# Altium PCB SPT3G_LCBoardRev3.PcbDoc (part 3 of 4)
Units mil, origin at the board's own origin, x right, y up, seen from the top; angles counter-clockwise.
Board outline 7216.28 x 1969 mil, 6 copper layers (Top Layer, Signal Layer 1, Internal Plane 1, Internal Plane 2, Signal Layer 2, Bottom Layer), stack 61.6 mil thick; 25 components, 141 nets, 660 pads, 144 vias.
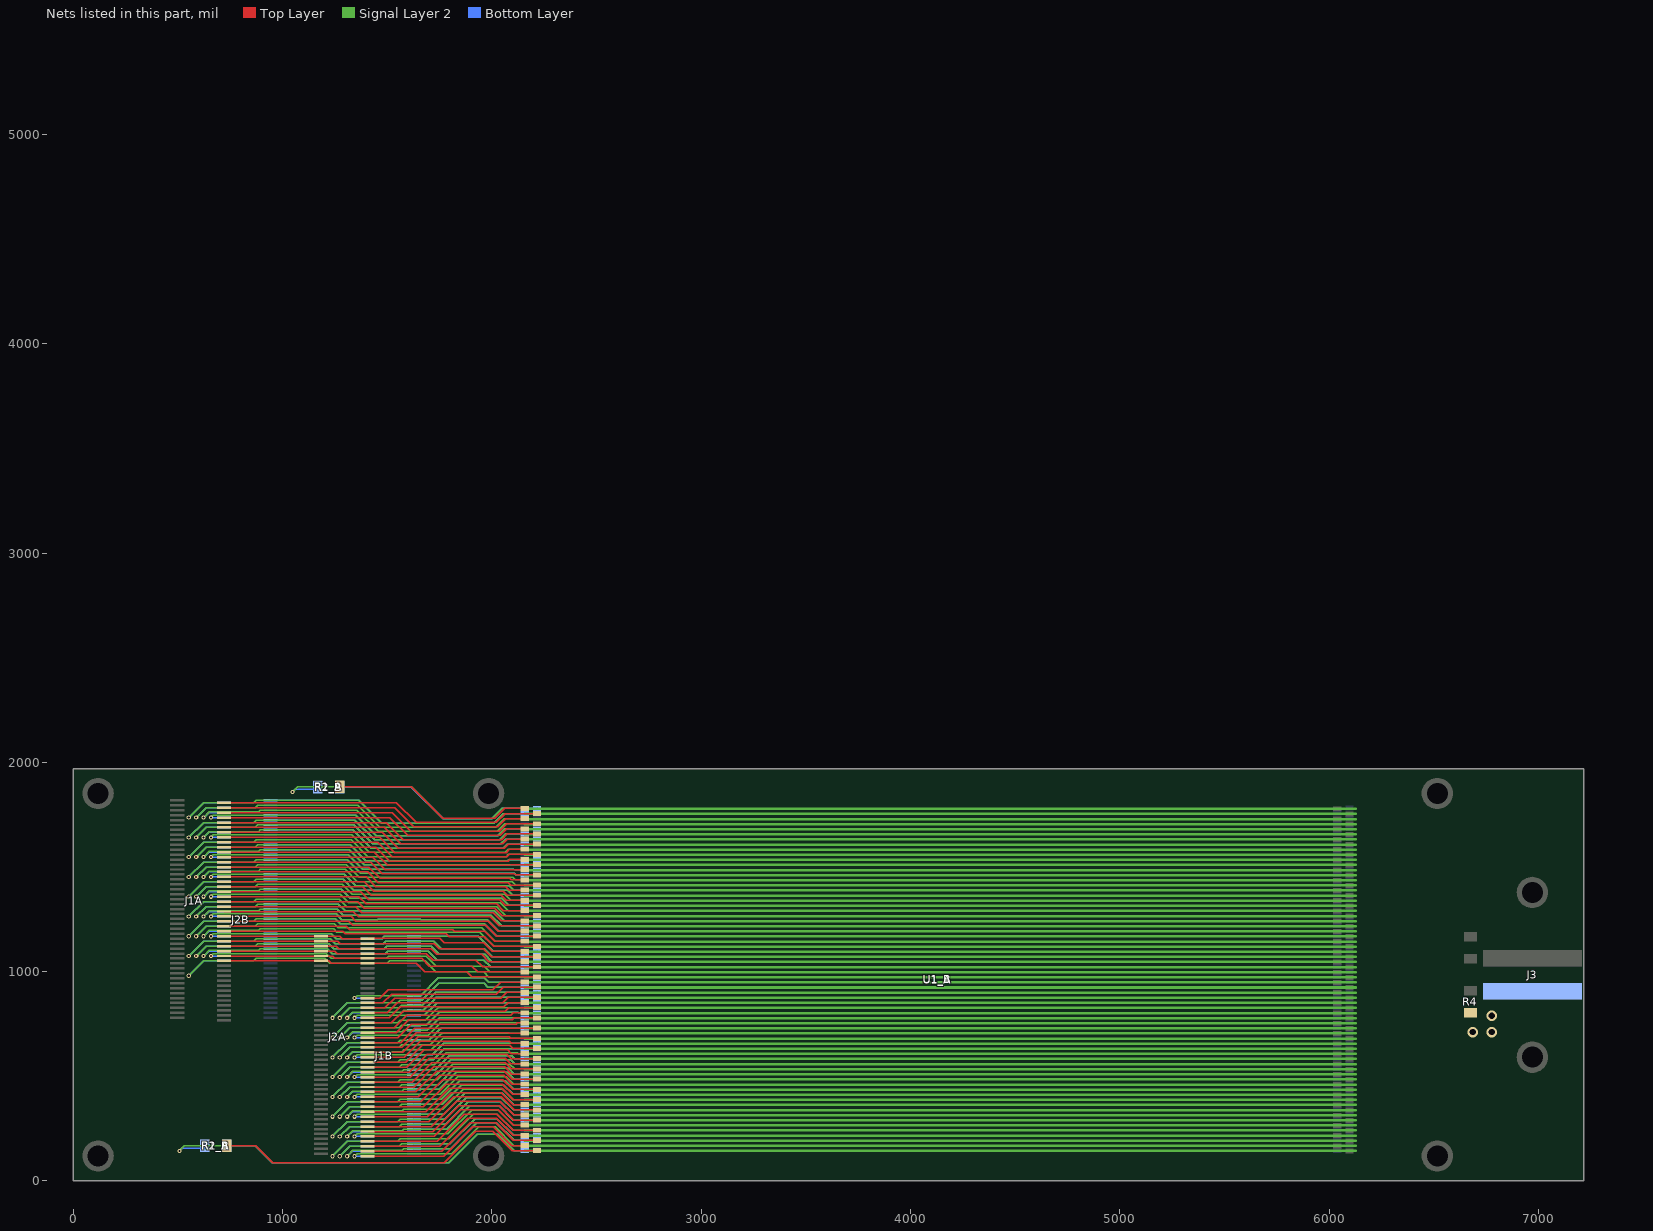
[diagram p7: the nets of this part, all layers, seen from the top]

## Via types
v1: diameter 20, hole 10, Top Layer to Bottom Layer, 136 vias
v2: diameter 50, hole 30, Top Layer to Bottom Layer, 8 vias

## Nets (pads, with @x,y where several pads share a name; then routed paths per layer and width w, separated by ;. In a path a pad name is that pad's centre, name@x,y a point inside that pad or via, vN(x,y) a via of type N, cw(c..) or ccw(c..) an arc to the next point about the centre after c; other vN are vias at no path point) (continued)
BOLORETURN_B: J1B.1 J1B.3 J1B.5 J1B.7 J1B.9 J1B.11 J1B.13 J1B.15 J1B.17 J1B.19 J1B.21 J1B.23 J1B.25 J1B.27 J1B.29 J1B.31 J1B.33 J1B.35 J1B.37 J1B.39 J1B.41 J1B.43 J1B.45 J1B.47 J1B.49 J1B.51 J1B.53 J1B.55 J1B.57 J1B.59 J1B.61 J1B.63 J1B.65 J2B.25 J2B.27 J2B.29 J2B.31 J2B.33 J2B.35 J2B.37 J2B.39 J2B.41 J2B.43 J2B.45 J2B.47 J2B.49 J2B.51 J2B.53 J2B.55 J2B.57 J2B.59 J2B.61 J2B.63 J2B.65 J2B.67 J2B.69 J2B.71 J2B.73 J2B.75 J2B.77 J2B.79 J2B.81 J2B.83 J2B.85 J2B.87 J2B.89 J3.4 R1_B.1 R2_B.1 R4.2 | length 367769.2
  Signal Layer 2 w6: v1(507.12,143.37) 531.02,167.27 531.11,167.18 869.6,167.18 950.14,86.64 1793.47,86.64 1929.99,223.15 ; v1(551.5,979.92) 622.36,1050.79 863.05,1050.79 874.86,1062.6 1200.86,1062.6 1223.9,1039.56 ; v1(551.5,1074.41) 622.36,1145.28 863.05,1145.28 874.86,1157.09 1227.95,1157.09 1251.57,1133.47 ; v1(551.5,1168.9) 622.36,1239.76 863.05,1239.76 874.86,1251.58 1252.04,1251.58 1274.94,1228.68 1461.77,1228.68 ; v1(551.5,1263.39) 622.36,1334.25 863.05,1334.25 874.86,1346.06 1270.69,1346.06 1307.15,1309.6 1978.77,1309.6 ; v1(551.5,1357.87) 622.36,1428.74 863.05,1428.74 874.86,1440.55 1289.34,1440.55 1340.29,1389.6 1978.77,1389.6 ; v1(551.5,1452.36) 622.36,1523.23 863.05,1523.23 874.86,1535.04 1307.99,1535.04 1373.42,1469.6 1978.77,1469.6 ; v1(551.5,1546.85) 622.36,1617.72 863.05,1617.72 874.86,1629.53 1326.64,1629.53 1406.56,1549.6 1978.77,1549.6 ; v1(551.5,1641.34) 622.36,1712.21 863.05,1712.21 874.86,1724.02 1345.28,1724.02 1439.7,1629.6 1978.77,1629.6 ; v1(551.5,1735.83) 622.36,1806.69 863.05,1806.69 874.86,1818.5 1363.93,1818.5 1472.84,1709.6 1978.77,1709.6 ; v1(586.93,1074.41) 634.17,1121.65 870.28,1121.65 882.09,1133.47 1219.75,1133.47 1243.37,1109.84 ; v1(586.93,1168.9) 634.17,1216.14 870.28,1216.14 882.09,1227.95 1247.07,1227.95 1266.12,1208.9 ; v1(586.93,1263.39) 634.17,1310.63 870.28,1310.63 882.09,1322.44 1266.03,1322.44 1298.87,1289.6 1978.77,1289.6 ; v1(586.93,1357.87) 634.17,1405.12 870.28,1405.12 882.09,1416.93 1284.68,1416.93 1332,1369.6 1978.77,1369.6 ; v1(586.93,1452.36) 634.17,1499.61 870.28,1499.61 882.09,1511.42 1303.32,1511.42 1365.14,1449.6 1978.77,1449.6 ; v1(586.93,1546.85) 634.17,1594.09 870.28,1594.09 882.09,1605.91 1321.97,1605.91 1398.28,1529.6 1978.77,1529.6 ; v1(586.93,1641.34) 634.17,1688.58 870.28,1688.58 882.09,1700.39 1340.62,1700.39 1431.41,1609.6 1978.77,1609.6 ; v1(586.93,1735.83) 634.17,1783.07 870.28,1783.07 882.09,1794.88 1359.27,1794.88 1464.55,1689.6 1978.77,1689.6 ; v1(622.36,1074.41) 649.92,1101.97 884.71,1101.97 892.58,1109.84 1213.95,1109.84 1237.66,1086.14 ; v1(622.36,1168.9) 649.92,1196.46 884.71,1196.46 892.58,1204.33 1243.04,1204.33 1258.47,1188.9 ; v1(622.36,1263.39) 649.92,1290.95 884.71,1290.95 892.58,1298.82 1261.37,1298.82 1290.58,1269.6 1978.77,1269.6 ; v1(622.36,1357.87) 649.92,1385.43 884.71,1385.43 892.58,1393.31 1280.01,1393.31 1323.72,1349.6 1978.77,1349.6 ; v1(622.36,1452.36) 649.92,1479.92 884.71,1479.92 892.58,1487.8 1298.66,1487.8 1356.86,1429.6 1978.77,1429.6 ; v1(622.36,1546.85) 649.92,1574.41 884.71,1574.41 892.58,1582.28 1317.31,1582.28 1389.99,1509.6 1978.77,1509.6 ; v1(622.36,1641.34) 649.92,1668.9 884.71,1668.9 892.58,1676.77 1335.96,1676.77 1423.13,1589.6 1978.77,1589.6 ; v1(622.36,1735.83) 649.92,1763.39 884.71,1763.39 892.58,1771.26 1354.61,1771.26 1456.27,1669.6 1978.77,1669.6 ; v1(657.8,1074.41) 669.61,1086.22 1209.06,1086.22 1232.68,1062.6 ; v1(657.8,1168.9) 669.61,1180.71 1232.55,1180.71 1256.17,1157.09 ; v1(657.8,1263.39) 669.61,1275.2 1256.7,1275.2 1283.22,1248.68 1453.49,1248.68 1453.71,1248.9 1660.38,1248.9 ; v1(657.8,1357.87) 669.61,1369.69 1275.35,1369.69 1315.44,1329.6 1978.77,1329.6 ; v1(657.8,1452.36) 669.61,1464.17 1294,1464.17 1348.57,1409.6 1978.77,1409.6 ; v1(657.8,1546.85) 669.61,1558.66 1312.65,1558.66 1381.71,1489.6 1978.77,1489.6 ; v1(657.8,1641.34) 669.61,1653.15 1331.3,1653.15 1414.85,1569.6 1978.77,1569.6 ; v1(657.8,1735.83) 669.61,1747.64 1349.95,1747.64 1447.98,1649.6 1978.77,1649.6 ; v1(1047.18,1858.6) 1071.08,1882.5 1614.87,1882.5 1767.78,1729.6 ; 1224.13,1038.98 1404.8,1038.98 1500.81,1038.98 1512.62,1050.79 1680.75,1050.79 1732.67,998.87 ; 1232.33,1062.6 1494.16,1062.6 1505.97,1074.41 1686.83,1074.41 1734.61,1026.63 ; v1(1237.48,117.72) 1308.35,188.58 1549.03,188.58 1560.84,200.39 1794.1,200.39 1911.51,317.81 ; v1(1237.48,212.21) 1308.35,283.07 1549.03,283.07 1560.84,294.88 1627.24,294.88 1775.45,294.88 1878.37,397.81 ; v1(1237.48,306.69) 1308.35,377.56 1549.03,377.56 1560.84,389.37 1627.24,389.37 1756.8,389.37 1845.24,477.81 ; v1(1237.48,401.18) 1308.35,472.05 1549.03,472.05 1560.84,483.86 1627.24,483.86 1738.15,483.86 1812.1,557.81 ; v1(1237.48,495.67) 1308.35,566.54 1549.03,566.54 1560.84,578.35 1627.24,578.35 1718.9,578.35 1744.25,603.7 ; v1(1237.48,590.16) 1308.35,661.02 1549.03,661.02 1560.84,672.84 1627.24,672.84 1700.25,672.84 1711.11,683.7 1711.72,683.7 1749.33,721.32 ; v1(1237.48,684.65) 1308.35,755.51 1549.03,755.51 1560.84,767.32 1627.24,767.32 1682.21,767.32 1727.81,812.93 ; v1(1237.48,779.13) 1308.35,850 1549.03,850 1560.84,861.81 1627.24,861.81 1663.56,861.81 1745.11,943.36 ; 1237.5,1086.22 1404.8,1086.22 1489.5,1086.22 1501.31,1098.03 1695.8,1098.03 1739.44,1054.39 ; 1243.17,1109.84 1404.8,1109.84 1484.84,1109.84 1496.65,1121.65 1709.48,1121.65 1748.99,1082.14 ; 1251.28,1133.47 1404.8,1133.47 1479.8,1133.47 1491.61,1145.28 1722.79,1145.28 1758.17,1109.9 ; 1255.94,1157.09 1404.8,1157.09 1475.03,1157.09 1485.61,1167.66 1626.01,1167.66 ; 1258.37,1188.68 1478.34,1188.68 1478.56,1188.9 1635.53,1188.9 ; 1266.65,1208.68 1470.06,1208.68 1470.28,1208.9 1643.81,1208.9 ; v1(1272.91,117.72) 1320.16,164.96 1556.26,164.96 1568.07,176.77 1798.76,176.77 1919.79,297.81 ; v1(1272.91,212.21) 1320.16,259.45 1556.26,259.45 1568.07,271.26 1627.24,271.26 1780.11,271.26 1886.66,377.81 ; v1(1272.91,306.69) 1320.16,353.94 1556.26,353.94 1568.07,365.75 1627.24,365.75 1761.46,365.75 1853.52,457.81 ; v1(1272.91,401.18) 1320.16,448.43 1556.26,448.43 1568.07,460.24 1627.24,460.24 1742.81,460.24 1820.38,537.81 ; v1(1272.91,495.67) 1320.16,542.91 1556.26,542.91 1568.07,554.72 1627.24,554.72 1723.56,554.72 1752.53,583.7 ; v1(1272.91,590.16) 1320.16,637.4 1556.26,637.4 1568.07,649.21 1627.24,649.21 1704.91,649.21 1719.4,663.7 1720,663.7 1754.11,697.81 ; v1(1272.91,684.65) 1320.16,731.89 1556.26,731.89 1568.07,743.7 1627.24,743.7 1686.87,743.7 1747.75,804.58 ; v1(1272.91,779.13) 1320.16,826.38 1556.26,826.38 1568.07,838.19 1668.22,838.19 1703.1,873.07 ; v1(1308.35,117.72) 1335.91,145.28 1570.69,145.28 1578.57,153.15 1803.42,153.15 1928.08,277.81 ; v1(1308.35,212.21) 1335.91,239.76 1570.69,239.76 1578.57,247.64 1627.24,247.64 1784.77,247.64 1894.94,357.81 ; v1(1308.35,306.69) 1335.91,334.25 1570.69,334.25 1578.57,342.13 1627.24,342.13 1766.12,342.13 1861.8,437.81 ; v1(1308.35,401.18) 1335.91,428.74 1570.69,428.74 1578.57,436.61 1627.24,436.61 1747.48,436.61 1828.67,517.81 ; v1(1308.35,495.67) 1335.91,523.23 1570.69,523.23 1578.57,531.1 1627.24,531.1 1728.83,531.1 1795.53,597.81 ; v1(1308.35,590.16) 1335.91,617.72 1570.69,617.72 1578.57,625.59 1627.24,625.59 1709.57,625.59 1727.68,643.7 1728.29,643.7 1762.39,677.81 ; v1(1308.35,684.65) 1335.91,712.21 1570.69,712.21 1578.57,720.08 1627.24,720.08 1690.92,720.08 1694.54,723.7 1695.15,723.7 1748.28,776.83 ; v1(1308.35,779.13) 1335.91,806.69 1570.69,806.69 1578.57,814.57 1627.24,814.57 1672.88,814.57 1717.25,858.93 ; v1(1343.78,117.72) 1355.59,129.53 1808.08,129.53 1936.36,257.81 ; v1(1343.78,212.21) 1355.59,224.02 1627.24,224.02 1789.43,224.02 1903.23,337.81 ; v1(1343.78,306.69) 1355.59,318.5 1627.24,318.5 1770.79,318.5 1870.09,417.81 ; v1(1343.78,401.18) 1355.59,412.99 1627.24,412.99 1752.14,412.99 1836.95,497.81 ; v1(1343.78,495.67) 1355.59,507.48 1627.24,507.48 1733.49,507.48 1803.82,577.81 ; v1(1343.78,590.16) 1355.59,601.97 1627.24,601.97 1714.23,601.97 1735.97,623.7 ; v1(1343.78,684.65) 1355.59,696.46 1627.24,696.46 1695.58,696.46 1702.83,703.7 1703.44,703.7 1748.81,749.07 ; v1(1343.78,779.13) 1355.59,790.95 1677.54,790.95 1731.39,844.79 ; v1(1343.78,873.62) 1355.59,885.43 1658.89,885.43 1744.58,971.12 ; 1461.99,1228.9 1652.1,1228.9 ; 1626.01,1167.62 1741.75,1167.85 ; 1635.75,1188.68 1772.47,1188.68 ; 1644.03,1208.68 1797.92,1208.68 ; 1652.32,1228.68 1823.35,1228.68 ; 1660.6,1248.68 1978.77,1248.68 ; 1769,656.74 2215.87,656.74 ; 2126.47,144.14 2156.82,144.14 ; 2126.47,168.55 2215.87,168.55 ; 2126.47,192.96 2156.82,192.96 ; 2126.47,217.37 2215.87,217.37 ; 2126.47,241.78 2156.82,241.78 ; 2126.47,266.19 2215.87,266.19 ; 2126.47,290.6 2156.82,290.6 ; 2126.47,315.01 2215.87,315.01 ; 2126.47,339.42 2156.82,339.42 ; 2126.47,363.83 2215.87,363.83 ; 2126.47,388.24 2156.82,388.24 ; 2126.47,412.64 2215.87,412.64 ; 2126.47,437.05 2156.82,437.05 ; 2126.47,461.46 2215.87,461.46 ; 2126.47,485.87 2156.82,485.87 ; 2126.47,510.28 2215.87,510.28 ; 2126.47,534.69 2156.82,534.69 ; 2126.47,559.1 2215.87,559.1 ; 2126.47,583.51 2156.82,583.51 ; 2126.47,607.92 2215.87,607.92 ; 2126.47,632.33 2156.82,632.33 ; 2126.47,681.15 2156.82,681.15 ; 2126.47,705.56 2215.87,705.56 ; 2126.47,729.97 2156.82,729.97 ; 2126.47,754.38 2215.87,754.38 ; 2126.47,778.79 2156.82,778.79 ; 2126.47,803.2 2215.87,803.2 ; 2126.47,827.61 2156.82,827.61 ; 2126.47,852.02 2215.87,852.02 ; 2126.47,876.42 2156.82,876.42 ; 2126.47,900.83 2215.87,900.83 ; 2126.47,925.24 2156.82,925.24 ; 2126.47,949.65 2215.87,949.65 ; 2126.47,974.06 2156.82,974.06 ; 2126.47,998.47 2215.87,998.47 ; 2126.47,1022.88 2156.82,1022.88 ; 2126.47,1047.29 2215.87,1047.29 ; 2126.47,1071.7 2156.82,1071.7 ; 2126.47,1096.11 2215.87,1096.11 ; 2126.47,1120.52 2156.82,1120.52 ; 2126.47,1144.93 2215.87,1144.93 ; 2126.47,1169.34 2156.82,1169.34 ; 2126.47,1193.75 2215.87,1193.75 ; 2126.47,1218.16 2156.82,1218.16 ; 2126.47,1242.57 2215.87,1242.57 ; 2126.47,1266.98 2156.82,1266.98 ; 2126.47,1291.39 2215.87,1291.39 ; 2126.47,1315.79 2156.82,1315.79 ; 2126.47,1340.2 2215.87,1340.2 ; 2126.47,1364.61 2156.82,1364.61 ; 2126.47,1389.02 2215.87,1389.02 ; 2126.47,1413.43 2156.82,1413.43 ; 2126.47,1437.84 2215.87,1437.84 ; 2126.47,1462.25 2156.82,1462.25 ; 2126.47,1486.66 2215.87,1486.66 ; 2126.47,1511.07 2156.82,1511.07 ; 2126.47,1535.48 2215.87,1535.48 ; 2126.47,1559.89 2156.82,1559.89 ; 2126.47,1584.3 2215.87,1584.3 ; 2126.47,1608.71 2156.82,1608.71 ; 2126.47,1633.12 2215.87,1633.12 ; 2126.47,1657.53 2156.82,1657.53 ; 2126.47,1681.94 2215.87,1681.94 ; 2126.47,1706.35 2156.82,1706.35 ; 2126.47,1730.76 2215.87,1730.76 ; 2126.47,1755.16 2156.82,1755.16 ; 2126.47,1779.57 2215.87,1779.57
  Signal Layer 2 w6.01: 1703.1,873.07 1730.86,900.83 2126.47,900.83 ; 1717.25,858.93 1734.74,876.42 2126.47,876.42 ; 1727.81,812.93 1742.49,827.61 2126.47,827.61 ; 1731.39,844.79 1738.61,852.02 2126.47,852.02 ; 1732.67,998.87 1959.94,998.87 1984.75,974.06 2126.47,974.06 ; 1734.61,1026.63 1962.25,1026.63 1990.41,998.47 2126.47,998.47 ; 1735.97,623.7 1769,656.74 ; 1739.44,1054.39 1961.69,1054.39 1993.2,1022.88 2126.47,1022.88 ; 1741.75,1167.85 1934.13,1167.85 2005.88,1096.11 2126.47,1096.11 ; 1744.25,603.7 1772.88,632.33 2126.47,632.33 ; 1744.58,971.12 1964.07,971.12 1985.54,949.65 2126.47,949.65 ; 1745.11,943.36 1962.47,943.36 1980.59,925.24 2126.47,925.24 ; 1747.75,804.58 2125.08,804.58 2126.47,803.2 ; 1748.28,776.83 1750.24,778.79 2126.47,778.79 ; 1748.81,749.07 1754.11,754.38 2126.47,754.38 ; 1748.99,1082.14 1965.44,1082.14 2000.29,1047.29 2126.47,1047.29 ; 1749.33,721.32 1757.99,729.97 2126.47,729.97 ; 1752.53,583.7 1781.52,612.68 2121.7,612.68 2126.47,607.92 ; 1754.11,697.81 1761.86,705.56 2126.47,705.56 ; 1758.17,1109.9 1963.45,1109.9 2001.65,1071.7 2126.47,1071.7 ; 1762.39,677.81 1765.74,681.15 2126.47,681.15 ; 1767.78,1729.6 2000.03,1729.6 2050,1779.57 2126.47,1779.57 ; 1772.47,1188.68 1942.66,1188.68 2010.82,1120.52 2126.47,1120.52 ; 1795.53,597.81 2095.7,597.81 2110,583.51 2126.47,583.51 ; 1797.92,1208.68 1951.29,1208.68 2015.04,1144.93 2126.47,1144.93 ; 1803.82,577.81 2090.61,577.81 2109.31,559.1 2126.47,559.1 ; 1812.1,557.81 2085.93,557.81 2109.05,534.69 2126.47,534.69 ; 1820.38,537.81 2080.12,537.81 2107.64,510.28 2126.47,510.28 ; 1823.35,1228.68 1962.79,1228.68 2022.13,1169.34 2126.47,1169.34 ; 1828.67,517.81 2075.91,517.81 2107.85,485.87 2126.47,485.87 ; 1836.95,497.81 2067.41,497.81 2103.75,461.46 2126.47,461.46 ; 1845.24,477.81 2063.21,477.81 2103.96,437.05 2126.47,437.05 ; 1853.52,457.81 2056.85,457.81 2102.01,412.64 2126.47,412.64 ; 1861.8,437.81 2052.11,437.81 2101.68,388.24 2126.47,388.24 ; 1870.09,417.81 2050.06,417.81 2104.04,363.83 2126.47,363.83 ; 1878.37,397.81 2045.32,397.81 2103.71,339.42 2126.47,339.42 ; 1886.66,377.81 2040.58,377.81 2103.38,315.01 2126.47,315.01 ; 1894.94,357.81 2034.22,357.81 2101.43,290.6 2126.47,290.6 ; 1903.23,337.81 2030.56,337.81 2102.18,266.19 2126.47,266.19 ; 1911.51,317.81 2024.74,317.81 2100.77,241.78 2126.47,241.78 ; 1919.79,297.81 2023.23,297.81 2103.67,217.37 2126.47,217.37 ; 1928.08,277.81 2020.64,277.81 2105.49,192.96 2126.47,192.96 ; 1929.99,223.15 2026.89,223.15 2105.9,144.14 2126.47,144.14 ; 1936.36,257.81 2015.9,257.81 2105.16,168.55 2126.47,168.55 ; 1978.77,1248.68 2033.7,1193.75 2126.47,1193.75 ; 1978.77,1269.6 1995.04,1269.6 2046.48,1218.16 2126.47,1218.16 ; 1978.77,1289.6 2011.61,1289.6 2058.65,1242.57 2126.47,1242.57 ; 1978.77,1309.6 2022.52,1309.6 2065.15,1266.98 2126.47,1266.98 ; 1978.77,1329.6 2038.89,1329.6 2077.1,1291.39 2126.47,1291.39 ; 1978.77,1349.6 2046.37,1349.6 2080.17,1315.79 2126.47,1315.79 ; 1978.77,1369.6 2060.31,1369.6 2089.71,1340.2 2126.47,1340.2 ; 1978.77,1389.6 2074.66,1389.6 2099.64,1364.61 2126.47,1364.61 ; 1978.77,1409.6 2083.35,1409.6 2103.92,1389.02 2126.47,1389.02 ; 1978.77,1429.6 2097.29,1429.6 2113.46,1413.43 2126.47,1413.43 ; 1978.77,1449.6 2099.92,1449.6 2111.68,1437.84 2126.47,1437.84 ; 1978.77,1469.6 2106.18,1469.6 2113.53,1462.25 2126.47,1462.25 ; 1978.77,1489.6 2105.18,1489.6 2108.12,1486.66 2126.47,1486.66 ; 1978.77,1509.6 2125,1509.6 ; 1978.77,1529.6 2073.92,1529.6 2079.8,1535.48 2126.47,1535.48 ; 1978.77,1549.6 2068.47,1549.6 2078.75,1559.89 2126.47,1559.89 ; 1978.77,1569.6 2062.6,1569.6 2077.3,1584.3 2126.47,1584.3 ; 1978.77,1589.6 2053.91,1589.6 2073.02,1608.71 2126.47,1608.71 ; 1978.77,1609.6 2042.8,1609.6 2066.32,1633.12 2126.47,1633.12 ; 1978.77,1629.6 2037.83,1629.6 2065.75,1657.53 2126.47,1657.53 ; 1978.77,1649.6 2028.69,1649.6 2061.03,1681.94 2126.47,1681.94 ; 1978.77,1669.6 2025.07,1669.6 2061.81,1706.35 2126.47,1706.35 ; 1978.77,1689.6 2017.51,1689.6 2058.66,1730.76 2126.47,1730.76 ; 1978.77,1709.6 2008.37,1709.6 2053.94,1755.16 2126.47,1755.16
  Signal Layer 2 w12: 2156.38,143.17 6128.42,143.17 ; 2156.38,167.57 6128.42,167.57 ; 2156.38,191.97 6128.42,191.97 ; 2156.38,216.37 6128.42,216.37 ; 2156.38,240.76 6128.42,240.76 ; 2156.38,265.16 6128.42,265.16 ; 2156.38,289.56 6128.42,289.56 ; 2156.38,313.96 6128.42,313.96 ; 2156.38,338.35 6128.42,338.35 ; 2156.38,362.75 6128.42,362.75 ; 2156.38,387.15 6128.42,387.15 ; 2156.38,411.55 6128.42,411.55 ; 2156.38,435.95 6128.42,435.95 ; 2156.38,460.34 6128.42,460.34 ; 2156.38,484.74 6128.42,484.74 ; 2156.38,509.14 6128.42,509.14 ; 2156.38,533.54 6128.42,533.54 ; 2156.38,557.93 6128.42,557.93 ; 2156.38,582.33 6128.42,582.33 ; 2156.38,606.73 6128.42,606.73 ; 2156.38,631.13 6128.42,631.13 ; 2156.38,655.52 6128.42,655.52 ; 2156.38,679.92 6128.42,679.92 ; 2156.38,704.32 6128.42,704.32 ; 2156.38,728.72 6128.42,728.72 ; 2156.38,753.11 6128.42,753.11 ; 2156.38,777.51 6128.42,777.51 ; 2156.38,801.91 6128.42,801.91 ; 2156.38,826.31 6128.42,826.31 ; 2156.38,850.7 6128.42,850.7 ; 2156.38,875.1 6128.42,875.1 ; 2156.38,899.5 6128.42,899.5 ; 2156.38,923.9 6128.42,923.9 ; 2156.38,948.29 6128.42,948.29 ; 2156.38,972.69 6128.42,972.69 ; 2156.38,997.09 6128.42,997.09 ; 2156.38,1021.49 6128.42,1021.49 ; 2156.38,1045.89 6128.42,1045.89 ; 2156.38,1070.28 6128.42,1070.28 ; 2156.38,1094.68 6128.42,1094.68 ; 2156.38,1119.08 6128.42,1119.08 ; 2156.38,1143.48 6128.42,1143.48 ; 2156.38,1167.87 6128.42,1167.87 ; 2156.38,1192.27 6128.42,1192.27 ; 2156.38,1216.67 6128.42,1216.67 ; 2156.38,1241.07 6128.42,1241.07 ; 2156.38,1265.46 6128.42,1265.46 ; 2156.38,1289.86 6128.42,1289.86 ; 2156.38,1314.26 6128.42,1314.26 ; 2156.38,1338.66 6128.42,1338.66 ; 2156.38,1363.05 6128.42,1363.05 ; 2156.38,1387.45 6128.42,1387.45 ; 2156.38,1411.85 6128.42,1411.85 ; 2156.38,1436.25 6128.42,1436.25 ; 2156.38,1460.64 6128.42,1460.64 ; 2156.38,1485.04 6128.42,1485.04 ; 2156.38,1509.44 6128.42,1509.44 ; 2156.38,1533.84 6128.42,1533.84 ; 2156.38,1558.23 6128.42,1558.23 ; 2156.38,1582.63 6128.42,1582.63 ; 2156.38,1607.03 6128.42,1607.03 ; 2156.38,1631.43 6128.42,1631.43 ; 2156.38,1655.83 6128.42,1655.83 ; 2156.38,1680.22 6128.42,1680.22 ; 2156.38,1704.62 6128.42,1704.62 ; 2156.38,1729.02 6128.42,1729.02 ; 2156.38,1753.42 6128.42,1753.42 ; 2156.38,1777.81 6128.42,1777.81
  Bottom Layer w6: v1(507.12,143.37) 519.33,155.58 R1_B.1@628.29,155.58 ; v1(551.5,979.92) 622.36,1050.79 J2B.25@718.82,1050.79 ; v1(551.5,1074.41) 622.36,1145.28 J2B.33@718.82,1145.28 ; v1(551.5,1168.9) 622.36,1239.76 J2B.41@718.82,1239.76 ; v1(551.5,1263.39) 622.36,1334.25 J2B.49@718.82,1334.25 ; v1(551.5,1357.87) 622.36,1428.74 J2B.57@718.82,1428.74 ; v1(551.5,1452.36) 622.36,1523.23 J2B.65@718.82,1523.23 ; v1(551.5,1546.85) 622.36,1617.72 J2B.73@718.82,1617.72 ; v1(551.5,1641.34) 622.36,1712.21 J2B.81@718.82,1712.21 ; v1(551.5,1735.83) 622.36,1806.69 J2B.89@718.82,1806.69 ; v1(586.93,1074.41) 634.17,1121.65 J2B.31@718.82,1121.65 ; v1(586.93,1168.9) 634.17,1216.14 J2B.39@718.82,1216.14 ; v1(586.93,1263.39) 634.17,1310.63 J2B.47@718.82,1310.63 ; v1(586.93,1357.87) 634.17,1405.12 J2B.55@718.82,1405.12 ; v1(586.93,1452.36) 634.17,1499.61 J2B.63@718.82,1499.61 ; v1(586.93,1546.85) 634.17,1594.09 J2B.71@718.82,1594.09 ; v1(586.93,1641.34) 634.17,1688.58 J2B.79@718.82,1688.58 ; v1(586.93,1735.83) 634.17,1783.07 J2B.87@718.82,1783.07 ; v1(622.36,1074.41) 645.98,1098.03 J2B.29@718.82,1098.03 ; v1(622.36,1168.9) 645.98,1192.52 J2B.37@718.82,1192.52 ; v1(622.36,1263.39) 645.98,1287.01 J2B.45@718.82,1287.01 ; v1(622.36,1357.87) 645.98,1381.5 J2B.53@718.82,1381.5 ; v1(622.36,1452.36) 645.98,1475.98 J2B.61@718.82,1475.98 ; v1(622.36,1546.85) 645.98,1570.47 J2B.69@718.82,1570.47 ; v1(622.36,1641.34) 645.98,1664.96 J2B.77@718.82,1664.96 ; v1(622.36,1735.83) 645.98,1759.45 J2B.85@718.82,1759.45 ; v1(657.8,1074.41) J2B.27@718.82,1074.41 ; v1(657.8,1168.9) J2B.35@718.82,1168.9 ; v1(657.8,1263.39) J2B.43@718.82,1263.39 ; v1(657.8,1357.87) J2B.51@718.82,1357.87 ; v1(657.8,1452.36) J2B.59@718.82,1452.36 ; v1(657.8,1546.85) J2B.67@718.82,1546.85 ; v1(657.8,1641.34) J2B.75@718.82,1641.34 ; v1(657.8,1735.83) J2B.83@718.82,1735.83 ; v1(1047.18,1858.6) 1059.39,1870.81 R2_B.1@1168.34,1870.81 ; v1(1237.48,117.72) 1308.35,188.58 J1B.7@1404.8,188.58 ; v1(1237.48,212.21) 1308.35,283.07 J1B.15@1404.8,283.07 ; v1(1237.48,306.69) 1308.35,377.56 J1B.23@1404.8,377.56 ; v1(1237.48,401.18) 1308.35,472.05 J1B.31@1404.8,472.05 ; v1(1237.48,495.67) 1308.35,566.54 J1B.39@1404.8,566.54 ; v1(1237.48,590.16) 1308.35,661.02 J1B.47@1404.8,661.02 ; v1(1237.48,684.65) 1308.35,755.51 J1B.55@1404.8,755.51 ; v1(1237.48,779.13) 1308.35,850 J1B.63@1404.8,850 ; v1(1272.91,117.72) 1320.16,164.96 J1B.5@1404.8,164.96 ; v1(1272.91,212.21) 1320.16,259.45 J1B.13@1404.8,259.45 ; v1(1272.91,306.69) 1320.16,353.94 J1B.21@1404.8,353.94 ; v1(1272.91,401.18) 1320.16,448.43 J1B.29@1404.8,448.43 ; v1(1272.91,495.67) 1320.16,542.91 J1B.37@1404.8,542.91 ; v1(1272.91,590.16) 1320.16,637.4 J1B.45@1404.8,637.4 ; v1(1272.91,684.65) 1320.16,731.89 J1B.53@1404.8,731.89 ; v1(1272.91,779.13) 1320.16,826.38 J1B.61@1404.8,826.38 ; v1(1308.35,117.72) 1331.97,141.34 J1B.3@1404.8,141.34 ; v1(1308.35,212.21) 1331.97,235.83 J1B.11@1404.8,235.83 ; v1(1308.35,306.69) 1331.97,330.32 J1B.19@1404.8,330.32 ; v1(1308.35,401.18) 1331.97,424.8 J1B.27@1404.8,424.8 ; v1(1308.35,495.67) 1331.97,519.29 J1B.35@1404.8,519.29 ; v1(1308.35,590.16) 1331.97,613.78 J1B.43@1404.8,613.78 ; v1(1308.35,684.65) 1331.97,708.27 J1B.51@1404.8,708.27 ; v1(1308.35,779.13) 1331.97,802.76 J1B.59@1404.8,802.76 ; v1(1343.78,117.72) J1B.1@1404.8,117.72 ; v1(1343.78,212.21) J1B.9@1404.8,212.21 ; v1(1343.78,306.69) J1B.17@1404.8,306.69 ; v1(1343.78,401.18) J1B.25@1404.8,401.18 ; v1(1343.78,495.67) J1B.33@1404.8,495.67 ; v1(1343.78,590.16) J1B.41@1404.8,590.16 ; v1(1343.78,684.65) J1B.49@1404.8,684.65 ; v1(1343.78,779.13) J1B.57@1404.8,779.13 ; v1(1343.78,873.62) J1B.65@1404.8,873.62
  other v2: 6686.56,710.94 6777.72,710.94 6777.72,788.29
FREQA0: J2A.46 U1_A.45 | length 782.5
  Top Layer w6: J2A.46@1404.8,637.4 1568.15,637.4 1639.13,708.38 1958.38,708.38 ; 2126.38,705.67 U1_A.45@2156.73,705.67
  Top Layer w6.01: 1958.38,708.38 2080.63,708.38 2083.35,705.67 2126.38,705.67
FREQA1: J2A.36 U1_A.40 | length 840.9
  Top Layer w6: J2A.36@1404.8,755.51 1520.06,755.51 1575.38,810.83 1958.38,810.83 ; 2126.38,827.71 U1_A.40@2215.78,827.71
  Top Layer w6.01: 1958.38,810.83 2062.99,810.83 2079.87,827.71 2126.38,827.71
FREQA2: J1A.24 U1_A.13 | length 1462.8
  Top Layer w6: J1A.24@718.82,1546.85 1430,1546.85 1489.84,1487.01 1958.38,1487.01 ; 2126.38,1486.77 U1_A.13@2156.73,1486.77
  Top Layer w6.01: 1958.38,1487.01 2126.14,1487.01 2126.38,1486.77
FREQA3: J1A.52 U1_A.27 | length 1467.4
  Top Layer w6: J1A.52@718.82,1216.14 1304.54,1216.14 1320.54,1200.14 1812.16,1200.14 1819.14,1193.17 1958.72,1193.17 ; 2126.38,1145.04 U1_A.27@2156.73,1145.04
  Top Layer w6.01: 1958.72,1193.17 1966.15,1193.17 2014.28,1145.04 2126.38,1145.04
FREQA4: J1A.64 J2A.9 J2A.10 U1_A.33 | length 1469.3
  Top Layer w6: J1A.64@718.82,1074.41 J2A.9@1182.36,1074.41 1238.23,1074.41 1250.04,1062.6 1663.61,1062.6 1699.58,1026.63 1861.66,1026.63 ; 2126.38,998.58 U1_A.33@2156.73,998.58
  Top Layer w6.01: 1861.66,1026.63 1904.32,1026.63 1932.38,998.58 2126.38,998.58
FREQA5: J2A.72 U1_A.58 | length 879.5
  Top Layer w6: J2A.72@1404.8,330.32 1684.54,330.32 1796.24,442.01 1958.38,442.01 ; 2126.38,388.34 U1_A.58@2215.78,388.34
  Top Layer w6.01: 1958.38,442.01 2047.85,442.01 2101.52,388.34 2126.38,388.34
FREQA6: J1A.30 U1_A.16 | length 1522.8
  Top Layer w6: J1A.30@718.82,1475.98 1406.47,1475.98 1456.92,1425.54 1958.38,1425.54 ; 2126.38,1413.54 U1_A.16@2215.78,1413.54
  Top Layer w6.01: 1958.38,1425.54 2078.12,1425.54 2090.11,1413.54 2126.38,1413.54
FREQA7: J2A.84 U1_A.64 | length 897
  Top Layer w6: J2A.84@1404.8,188.58 1737.64,188.58 1868.13,319.07 1958.38,319.07 ; 2126.38,241.89 U1_A.64@2215.78,241.89
  Top Layer w6.01: 1958.38,319.07 2023.66,319.07 2100.85,241.89 2126.38,241.89
FREQA8: J1A.4 U1_A.3 | length 1491.8
  Top Layer w6: J1A.4@718.82,1783.07 1535.27,1783.07 1626.43,1691.91 1958.38,1691.91 ; 2126.38,1730.86 U1_A.3@2156.73,1730.86
  Top Layer w6.01: 1958.38,1691.91 2026.82,1691.91 2065.78,1730.86 2126.38,1730.86
FREQA9: J1A.16 U1_A.9 | length 1474.3
  Top Layer w6: J1A.16@718.82,1641.34 1463.21,1641.34 1535.58,1568.97 1958.38,1568.97 ; 2126.38,1584.41 U1_A.9@2156.73,1584.41
  Top Layer w6.01: 1958.38,1568.97 2067.32,1568.97 2082.75,1584.41 2126.38,1584.41
FREQA10: J2A.78 U1_A.61 | length 829.2
  Top Layer w6: J2A.78@1404.8,259.45 1709.95,259.45 1831.04,380.54 1958.38,380.54 ; 2126.38,315.11 U1_A.61@2156.73,315.11
  Top Layer w6.01: 1958.38,380.54 2038.2,380.54 2103.63,315.11 2126.38,315.11
FREQA11: J2A.30 U1_A.37 | length 782.8
  Top Layer w6: J2A.30@1404.8,826.38 1488.88,826.38 1534.8,872.3 1958.38,872.3 ; 2126.38,900.94 U1_A.37@2156.73,900.94
  Top Layer w6.01: 1958.38,872.3 2042.23,872.3 2070.87,900.94 2126.38,900.94
FREQA12: J1A.12 U1_A.7 | length 1662.1
  Top Layer w6: J1A.12@718.82,1688.58 1484.62,1688.58 1563.26,1609.95 1776.38,1609.95 ; 2126.38,1633.22 U1_A.7@2156.73,1633.22 ; 1776.38,1609.95 1958.38,1609.95 1776.38,1609.95
  Top Layer w6.01: 1958.38,1609.95 2050.88,1609.95 2074.16,1633.22 2126.38,1633.22
FREQA13: J1A.36 U1_A.19 | length 1464.8
  Top Layer w6: J1A.36@718.82,1405.12 1383.49,1405.12 1424.55,1364.07 1958.38,1364.07 ; 2126.38,1340.31 U1_A.19@2156.73,1340.31
  Top Layer w6.01: 1958.38,1364.07 2043.66,1364.07 2067.42,1340.31 2126.38,1340.31
FREQA14: J2A.42 U1_A.43 | length 780.9
  Top Layer w6: J2A.42@1404.8,684.65 1549.12,684.65 1613.84,749.36 1958.38,749.36 ; 2126.38,754.48 U1_A.43@2156.73,754.48
  Top Layer w6.01: 1958.38,749.36 2116.65,749.36 2121.77,754.48 2126.38,754.48
FREQA15: J2A.54 U1_A.49 | length 794.1
  Top Layer w6: J2A.54@1404.8,542.91 1592.28,542.91 1675.79,626.42 1958.38,626.42 ; 2126.38,608.03 U1_A.49@2156.73,608.03
  Top Layer w6.01: 1958.38,626.42 2074.58,626.42 2092.98,608.03 2126.38,608.03
FREQA16: J1A.40 U1_A.21 | length 1465.4
  Top Layer w6: J1A.40@718.82,1357.87 1363.52,1357.87 1398.31,1323.09 1958.38,1323.09 ; 2126.38,1291.49 U1_A.21@2156.73,1291.49
  Top Layer w6.01: 1958.38,1323.09 2023.08,1323.09 2054.67,1291.49 2126.38,1291.49
FREQA17: J2A.66 U1_A.55 | length 811.7
  Top Layer w6: J2A.66@1404.8,401.18 1648.41,401.18 1750.71,503.48 1958.38,503.48 ; 2126.38,461.57 U1_A.55@2156.73,461.57
  Top Layer w6.01: 1958.38,503.48 2055.73,503.48 2097.64,461.57 2126.38,461.57
FREQA18: J1A.48 U1_A.25 | length 1466.7
  Top Layer w6: J1A.48@718.82,1263.39 1328.07,1263.39 1350.33,1241.13 1958.38,1241.13 ; 2126.38,1193.85 U1_A.25@2156.73,1193.85
  Top Layer w6.01: 1958.38,1241.13 1981.91,1241.13 2029.18,1193.85 2126.38,1193.85
FREQA19: J1A.60 J2A.5 J2A.6 U1_A.31 | length 1468.7
  Top Layer w6: J1A.60@718.82,1121.65 J2A.5@1182.36,1121.65 1257.11,1121.65 1268.92,1109.84 J2A.6@1404.8,1109.84 1709.33,1109.84 1737.03,1082.14 1951.07,1082.14 ; 2126.38,1047.4 U1_A.31@2156.73,1047.4
  Top Layer w6.01: 1951.07,1082.14 1985.81,1047.4 2126.38,1047.4
FREQA20: J2A.90 U1_A.67 | length 846.7
  Top Layer w6: J2A.90@1404.8,117.72 1769.67,117.72 1909.55,257.6 1958.38,257.6 ; 2126.38,168.66 U1_A.67@2156.73,168.66
  Top Layer w6.01: 1958.38,257.6 2006.9,257.6 2095.84,168.66 2126.38,168.66
FREQA21: J2A.58 U1_A.51 | length 800
  Top Layer w6: J2A.58@1404.8,495.67 1610.89,495.67 1700.67,585.44 1958.38,585.44 ; 2126.38,559.21 U1_A.51@2156.73,559.21
  Top Layer w6.01: 1958.38,585.44 2064.44,585.44 2090.68,559.21 2126.38,559.21
FREQA22: J1A.6 U1_A.4 | length 1547.9
  Top Layer w6: J1A.6@718.82,1759.45 1524.09,1759.45 1612.12,1671.42 1958.38,1671.42 ; 2126.38,1706.45 U1_A.4@2215.78,1706.45
  Top Layer w6.01: 1958.38,1671.42 2034.96,1671.42 2070,1706.45 2126.38,1706.45
FREQA23: J1A.54 U1_A.28 | length 1526.7
  Top Layer w6: J1A.54@718.82,1192.52 1287.03,1192.52 1299.9,1179.65 1781.49,1179.65 1795.73,1165.41 1958.72,1165.41 ; 2126.38,1120.63 U1_A.28@2215.78,1120.63
  Top Layer w6.01: 1958.72,1165.41 1963.13,1165.41 2007.91,1120.63 2126.38,1120.63
FREQA24: J1A.18 U1_A.10 | length 1530.4
  Top Layer w6: J1A.18@718.82,1617.72 1454.69,1617.72 1523.93,1548.48 1958.38,1548.48 ; 2126.38,1560 U1_A.10@2215.78,1560
  Top Layer w6.01: 1958.38,1548.48 2070.23,1548.48 2081.75,1560 2126.38,1560
FREQA25: J1A.28 U1_A.15 | length 1463.4
  Top Layer w6: J1A.28@718.82,1499.61 1411.85,1499.61 1465.43,1446.03 1958.38,1446.03 ; 2126.38,1437.95 U1_A.15@2156.73,1437.95
  Top Layer w6.01: 1958.38,1446.03 2084.83,1446.03 2092.91,1437.95 2126.38,1437.95
FREQA26: J2A.34 U1_A.39 | length 782.2
  Top Layer w6: J2A.34@1404.8,779.13 1510.4,779.13 1562.59,831.32 1958.38,831.32 ; 2126.38,852.12 U1_A.39@2156.73,852.12
  Top Layer w6.01: 1958.38,831.32 2056.82,831.32 2077.61,852.12 2126.38,852.12
FREQA27: J2A.82 U1_A.63 | length 835
  Top Layer w6: J2A.82@1404.8,212.21 1724.74,212.21 1852.1,339.56 1958.38,339.56 ; 2126.38,266.3 U1_A.63@2156.73,266.3
  Top Layer w6.01: 1958.38,339.56 2030.29,339.56 2103.55,266.3 2126.38,266.3
FREQA28: J1A.66 J2A.11 J2A.12 U1_A.34 | length 1528.7
  Top Layer w6: J1A.66@718.82,1050.79 J2A.11@1182.36,1050.79 1221.22,1050.79 1233.03,1038.98 1639.45,1038.98 1679.55,998.87 1861.66,998.87 ; 2126.38,974.17 U1_A.34@2215.78,974.17
  Top Layer w6.01: 1861.66,998.87 1879.11,998.87 1903.81,974.17 2126.38,974.17
FREQA29: J2A.48 U1_A.46 | length 844.4
  Top Layer w6: J2A.48@1404.8,613.78 1574.53,613.78 1648.64,687.89 1958.38,687.89 ; 2126.38,681.26 U1_A.46@2215.78,681.26
  Top Layer w6.01: 1958.38,687.89 2082.45,687.89 2089.09,681.26 2126.38,681.26
FREQA30: J2A.70 U1_A.57 | length 817.5
  Top Layer w6: J2A.70@1404.8,353.94 1672.16,353.94 1780.73,462.5 1958.38,462.5 ; 2126.38,412.75 U1_A.57@2156.73,412.75
  Top Layer w6.01: 1958.38,462.5 2050.03,462.5 2099.78,412.75 2126.38,412.75
FREQA31: J1A.42 U1_A.22 | length 1524.8
  Top Layer w6: J1A.42@718.82,1334.25 1357.79,1334.25 1389.45,1302.6 1958.38,1302.6 ; 2126.38,1267.08 U1_A.22@2215.78,1267.08
  Top Layer w6.01: 1958.38,1302.6 2014.22,1302.6 2049.73,1267.08 2126.38,1267.08
FREQA32: J2A.60 U1_A.52 | length 862
  Top Layer w6: J2A.60@1404.8,472.05 1618.68,472.05 1711.59,564.95 1958.38,564.95 ; 2126.38,534.8 U1_A.52@2215.78,534.8
  Top Layer w6.01: 1958.38,564.95 2063.15,564.95 2093.31,534.8 2126.38,534.8
FREQA33: R1_A.2 U1_A.1 | length 964.7
  Top Layer w6: R1_A.2@1273.38,1882.5 1614.87,1882.5 1764.49,1732.89 1958.38,1732.89 ; 2126.38,1779.68 U1_A.1@2156.73,1779.68
  Top Layer w6.01: 1958.38,1732.89 2013.39,1732.89 2060.19,1779.68 2126.38,1779.68
FREQA34: R2_A.2 U1_A.68 | length 1616.7
  Top Layer w6: R2_A.2@733.32,167.27 871.18,167.27 951.81,86.64 1772.92,86.64 1923.4,237.11 1958.38,237.11 ; 2126.38,144.25 U1_A.68@2215.78,144.25
  Top Layer w6.01: 1958.38,237.11 2004.47,237.11 2097.33,144.25 2126.38,144.25
FREQA35: J1A.22 U1_A.12 | length 1524.6
  Top Layer w6: J1A.22@718.82,1570.47 1438.9,1570.47 1501.88,1507.5 1958.38,1507.5 ; 2126.38,1511.18 U1_A.12@2215.78,1511.18
  Top Layer w6.01: 1958.38,1507.5 2085.09,1507.5 2088.77,1511.18 2126.38,1511.18
FREQA36: J2A.32 U1_A.38 | length 841.5
  Top Layer w6: J2A.32@1404.8,802.76 1499.64,802.76 1548.7,851.81 1958.38,851.81 ; 2126.38,876.53 U1_A.38@2215.78,876.53
  Top Layer w6.01: 1958.38,851.81 2052.41,851.81 2077.13,876.53 2126.38,876.53
FREQA37: J1A.34 U1_A.18 | length 1523.5
  Top Layer w6: J1A.34@718.82,1428.74 1390.57,1428.74 1434.76,1384.56 1958.38,1384.56 ; 2126.38,1364.72 U1_A.18@2215.78,1364.72
  Top Layer w6.01: 1958.38,1384.56 2053.95,1384.56 2073.79,1364.72 2126.38,1364.72
FREQA38: J2A.44 U1_A.44 | length 839.6
  Top Layer w6: J2A.44@1404.8,661.02 1563.25,661.02 1631.1,728.87 1958.38,728.87 ; 2126.38,730.08 U1_A.44@2215.78,730.08
  Top Layer w6.01: 1958.38,728.87 2105.05,728.87 2106.25,730.08 2126.38,730.08
FREQA39: J1A.14 U1_A.8 | length 1536.3
  Top Layer w6: J1A.14@718.82,1664.96 1476.99,1664.96 1552.49,1589.46 1958.38,1589.46 ; 2126.38,1608.82 U1_A.8@2215.78,1608.82
  Top Layer w6.01: 1958.38,1589.46 2057.77,1589.46 2077.13,1608.82 2126.38,1608.82
FREQA40: J1A.62 J2A.7 J2A.8 U1_A.32 | length 1528
  Top Layer w6: J1A.62@718.82,1098.03 J2A.7@1182.36,1098.03 1248.36,1098.03 1260.17,1086.22 1687.06,1086.22 1718.89,1054.39 1861.66,1054.39 ; 2126.38,1022.99 U1_A.32@2215.78,1022.99
  Top Layer w6.01: 1861.66,1054.39 1923.82,1054.39 1955.21,1022.99 2126.38,1022.99
FREQA41: J2A.68 U1_A.56 | length 873.6
  Top Layer w6: J2A.68@1404.8,377.56 1658.78,377.56 1764.22,482.99 1958.38,482.99 ; 2126.38,437.16 U1_A.56@2215.78,437.16
  Top Layer w6.01: 1958.38,482.99 2052.66,482.99 2098.49,437.16 2126.38,437.16
FREQA42: J2A.80 U1_A.62 | length 891.2
  Top Layer w6: J2A.80@1404.8,235.83 1716.67,235.83 1840.9,360.05 1958.38,360.05 ; 2126.38,290.71 U1_A.62@2215.78,290.71
  Top Layer w6.01: 1958.38,360.05 2036.02,360.05 2105.37,290.71 2126.38,290.71
FREQA43: J1A.58 J2A.3 J2A.4 U1_A.30 | length 1527.4
  Top Layer w6: J1A.58@718.82,1145.28 J2A.3@1182.36,1145.28 1263.33,1145.28 1275.14,1133.47 J2A.4@1404.8,1133.47 1725.49,1133.47 1749.06,1109.9 1958.72,1109.9 ; 2126.38,1071.81 U1_A.30@2215.78,1071.81
  Top Layer w6.01: 1958.72,1109.9 1959.22,1109.9 1997.31,1071.81 2126.38,1071.81
FREQA44: J2A.56 U1_A.50 | length 856.1
  Top Layer w6: J2A.56@1404.8,519.29 1605.04,519.29 1691.68,605.93 1958.38,605.93 ; 2126.38,583.62 U1_A.50@2215.78,583.62
  Top Layer w6.01: 1958.38,605.93 2069.73,605.93 2092.05,583.62 2126.38,583.62
FREQA45: J1A.10 U1_A.6 | length 1542.1
  Top Layer w6: J1A.10@718.82,1712.21 1495.61,1712.21 1577.38,1630.44 1958.38,1630.44 ; 2126.38,1657.63 U1_A.6@2215.78,1657.63
  Top Layer w6.01: 1958.38,1630.44 2046.96,1630.44 2074.16,1657.63 2126.38,1657.63
FREQA46: J2A.28 U1_A.36 | length 842.2
  Top Layer w6: J2A.28@1404.8,850 1477.74,850 1520.54,892.79 1958.38,892.79 ; 2126.38,925.35 U1_A.36@2215.78,925.35
  Top Layer w6.01: 1958.38,892.79 2020.49,892.79 2053.05,925.35 2126.38,925.35
FREQA47: J2A.40 U1_A.42 | length 840.2
  Top Layer w6: J2A.40@1404.8,708.27 1541.78,708.27 1603.37,769.85 1958.38,769.85 ; 2126.38,778.89 U1_A.42@2215.78,778.89
  Top Layer w6.01: 1958.38,769.85 2097.14,769.85 2106.18,778.89 2126.38,778.89
FREQA48: J1A.38 U1_A.20 | length 1524.1
  Top Layer w6: J1A.38@718.82,1381.5 1374.18,1381.5 1412.1,1343.58 1958.38,1343.58 ; 2126.38,1315.9 U1_A.20@2215.78,1315.9
  Top Layer w6.01: 1958.38,1343.58 2036.23,1343.58 2063.91,1315.9 2126.38,1315.9
FREQA49: J2A.52 U1_A.48 | length 850.3
  Top Layer w6: J2A.52@1404.8,566.54 1587.28,566.54 1667.66,646.91 1958.38,646.91 ; 2126.38,632.44 U1_A.48@2215.78,632.44
  Top Layer w6.01: 1958.38,646.91 2084.76,646.91 2099.24,632.44 2126.38,632.44
FREQA50: J1A.46 U1_A.24 | length 1525.4
  Top Layer w6: J1A.46@718.82,1287.01 1338.05,1287.01 1363.45,1261.62 1958.38,1261.62 ; 2126.38,1218.26 U1_A.24@2215.78,1218.26
  Top Layer w6.01: 1958.38,1261.62 1992.2,1261.62 2035.55,1218.26 2126.38,1218.26
FREQA51: J1A.2@718.82,1806.69 U1_A.2 | length 1553.8
  Top Layer w6: J1A.2@718.82,1806.69 1543.46,1806.69 1637.76,1712.4 1958.38,1712.4 ; 2126.38,1755.27 U1_A.2@2215.78,1755.27
  Top Layer w6.01: 1958.38,1712.4 2020.11,1712.4 2062.98,1755.27 2126.38,1755.27
FREQA52: J2A.64 U1_A.54 | length 867.8
  Top Layer w6: J2A.64@1404.8,424.8 1636.03,424.8 1735.2,523.97 1958.38,523.97 ; 2126.38,485.98 U1_A.54@2215.78,485.98
  Top Layer w6.01: 1958.38,523.97 2059.68,523.97 2097.67,485.98 2126.38,485.98
FREQA53: J1A.50 U1_A.26 | length 1526.1
  Top Layer w6: J1A.50@718.82,1239.76 1315.52,1239.76 1334.37,1220.92 1958.72,1220.92 ; 2126.38,1169.45 U1_A.26@2215.78,1169.45
  Top Layer w6.01: 1958.72,1220.92 1970.61,1220.92 2022.09,1169.45 2126.38,1169.45
FREQA54: J2A.86 U1_A.65 | length 840.9
  Top Layer w6: J2A.86@1404.8,164.96 1751.43,164.96 1885.05,298.58 1958.38,298.58 ; 2126.38,217.48 U1_A.65@2156.73,217.48
  Top Layer w6.01: 1958.38,298.58 2021.48,298.58 2102.59,217.48 2126.38,217.48
FREQA55: J1A.56 J2A.1 J2A.2@1404.8,1157.09 U1_A.29 | length 1469.7
  Top Layer w6: J1A.56@718.82,1168.9 1273.7,1168.9 1285.51,1157.09 J2A.2@1404.8,1157.09 1406.88,1159.16 1750.44,1159.16 1771.95,1137.65 1958.72,1137.65 ; 2126.38,1096.22 U1_A.29@2156.73,1096.22
  Top Layer w6.01: 1958.72,1137.65 1960.1,1137.65 2001.54,1096.22 2126.38,1096.22
FREQA56: J2A.74 U1_A.59 | length 823.3
  Top Layer w6: J2A.74@1404.8,306.69 1689.92,306.69 1804.75,421.52 1958.38,421.52 ; 2126.38,363.93 U1_A.59@2156.73,363.93
  Top Layer w6.01: 1958.38,421.52 2043.9,421.52 2101.48,363.93 2126.38,363.93
FREQA57: J2A.76 U1_A.60 | length 885.3
  Top Layer w6: J2A.76@1404.8,283.07 1698.98,283.07 1816.94,401.03 1958.38,401.03 ; 2126.38,339.52 U1_A.60@2215.78,339.52
  Top Layer w6.01: 1958.38,401.03 2045.72,401.03 2107.22,339.52 2126.38,339.52
FREQA58: J1A.20 U1_A.11 | length 1468.4
  Top Layer w6: J1A.20@718.82,1594.1 1445.76,1594.09 1511.87,1527.99 1958.38,1527.99 ; 2126.38,1535.59 U1_A.11@2156.73,1535.59
  Top Layer w6.01: 1958.38,1527.99 2078.38,1527.99 2085.98,1535.59 2126.38,1535.59
FREQA59: J1A.26 U1_A.14 | length 1522.2
  Top Layer w6: J1A.26@718.82,1523.23 1419.84,1523.23 1476.55,1466.52 1958.38,1466.52 ; 2126.38,1462.36 U1_A.14@2215.78,1462.36
  Top Layer w6.01: 1958.38,1466.52 2108.01,1466.52 2112.17,1462.36 2126.38,1462.36
FREQA60: J2A.50 U1_A.47 | length 788.3
  Top Layer w6: J2A.50@1404.8,590.16 1580.9,590.16 1658.15,667.4 1958.38,667.4 ; 2126.38,656.85 U1_A.47@2156.73,656.85
  Top Layer w6.01: 1958.38,667.4 2083.39,667.4 2093.94,656.85 2126.38,656.85
FREQA61: J1A.32 U1_A.17 | length 1464.1
  Top Layer w6: J1A.32@718.82,1452.36 1398.72,1452.36 1446.03,1405.05 1958.38,1405.05 ; 2126.38,1389.13 U1_A.17@2156.73,1389.13
  Top Layer w6.01: 1958.38,1405.05 2066.39,1405.05 2082.31,1389.13 2126.38,1389.13
FREQA62: J2A.38 U1_A.41 | length 781.5
  Top Layer w6: J2A.38@1404.8,731.89 1533.66,731.89 1592.11,790.34 1958.38,790.34 ; 2126.38,803.3 U1_A.41@2156.73,803.3
  Top Layer w6.01: 1958.38,790.34 2090.07,790.34 2103.03,803.3 2126.38,803.3
FREQA63: J2A.62 U1_A.53 | length 805.8
  Top Layer w6: J2A.62@1404.8,448.43 1627.17,448.43 1723.21,544.46 1958.38,544.46 ; 2126.38,510.39 U1_A.53@2156.73,510.39
  Top Layer w6.01: 1958.38,544.46 2060.53,544.46 2094.6,510.39 2126.38,510.39
FREQA64: J2A.88 U1_A.66 | length 902.8
  Top Layer w6: J2A.88@1404.8,141.34 1759.74,141.34 1896.5,278.09 1958.38,278.09 ; 2126.38,193.07 U1_A.66@2215.78,193.07
  Top Layer w6.01: 1958.38,278.09 2017.97,278.09 2102.99,193.07 2126.38,193.07
FREQA65: J1A.8 U1_A.5 | length 1718
  Top Layer w6: J1A.8@718.82,1735.83 1512.18,1735.83 1597.08,1650.93 1726.38,1650.93 ; 2126.38,1682.04 U1_A.5@2156.73,1682.04 ; 1726.38,1650.93 1958.38,1650.93 1726.38,1650.93
  Top Layer w6.01: 1958.38,1650.93 2039.53,1650.93 2070.65,1682.04 2126.38,1682.04
FREQA66: J1A.44 U1_A.23 | length 1466.1
  Top Layer w6: J1A.44@718.82,1310.63 1349.04,1310.63 1377.56,1282.11 1958.38,1282.11 ; 2126.38,1242.67 U1_A.23@2156.73,1242.67
  Top Layer w6.01: 1958.38,1282.11 2006.07,1282.11 2045.5,1242.67 2126.38,1242.67
FREQA67: J2A.26 U1_A.35 | length 783.5
  Top Layer w6: J2A.26@1404.8,873.62 1464.02,873.62 1503.68,913.28 1958.38,913.28 ; 2126.38,949.76 U1_A.35@2156.73,949.76
  Top Layer w6.01: 1958.38,913.28 2004.98,913.28 2041.46,949.76 2126.38,949.76
FREQB0: J2B.46 U1_B.45 | length 1249
  Bottom Layer w6: J2B.46@941.26,1298.82 1261.37,1298.82 1290.58,1269.6 1978.77,1269.6 ; 2126.47,1218.16 U1_B.45@2156.82,1218.16
  Bottom Layer w6.01: 1978.77,1269.6 1995.04,1269.6 2046.48,1218.16 2126.47,1218.16
FREQB1: J1B.89 J1B.90 J2B.36 U1_B.40 | length 1320.9
  Bottom Layer w6: J2B.36@941.26,1180.71 1232.32,1180.71 1255.94,1157.09 J1B.89@1404.8,1157.09 ; J1B.89@1406.88,1159.16 J1B.89@1404.8,1157.09 ; J1B.90@1627.24,1168.9 1626.01,1167.66 1485.61,1167.66 1475.03,1157.09 J1B.89@1404.8,1157.09 ; J1B.90@1628.29,1167.85 1741.75,1167.85 ; 2126.47,1096.11 U1_B.40@2215.87,1096.11
  Bottom Layer w6.01: 1741.75,1167.85 1934.13,1167.85 2005.88,1096.11 2126.47,1096.11
FREQB2: J1B.24 U1_B.13 | length 583.1
  Bottom Layer w6: J1B.24@1627.24,389.37 1756.8,389.37 1845.24,477.81 ; 2126.47,437.05 U1_B.13@2156.82,437.05
  Bottom Layer w6.01: 1845.24,477.81 2063.21,477.81 2103.96,437.05 2126.47,437.05
FREQB3: J1B.52 U1_B.27 | length 553.9
  Bottom Layer w6: J1B.52@1627.24,720.08 1690.92,720.08 1694.54,723.7 1695.15,723.7 1748.28,776.83 ; 2126.47,778.79 U1_B.27@2156.82,778.79
  Bottom Layer w6.01: 1748.28,776.83 1750.24,778.79 2126.47,778.79
FREQB4: J1B.64 U1_B.33 | length 570.9
  Bottom Layer w6: J1B.64@1627.24,861.81 1663.56,861.81 1745.11,943.36 ; 2126.47,925.24 U1_B.33@2156.82,925.24
  Bottom Layer w6.01: 1745.11,943.36 1962.47,943.36 1980.59,925.24 2126.47,925.24
FREQB5: J2B.72 U1_B.58 | length 1308.7
  Bottom Layer w6: J2B.72@941.26,1605.91 1321.97,1605.91 1398.28,1529.6 1978.77,1529.6 ; 2126.47,1535.48 U1_B.58@2215.87,1535.48
  Bottom Layer w6.01: 1978.77,1529.6 2073.92,1529.6 2079.8,1535.48 2126.47,1535.48
FREQB6: J1B.30 U1_B.16 | length 632.2
  Bottom Layer w6: J1B.30@1627.24,460.24 1742.81,460.24 1820.38,537.81 ; 2126.47,510.28 U1_B.16@2215.87,510.28
  Bottom Layer w6.01: 1820.38,537.81 2080.12,537.81 2107.64,510.28 2126.47,510.28
FREQB7: J2B.84 U1_B.64 | length 1328.6
  Bottom Layer w6: J2B.84@941.26,1747.64 1349.95,1747.64 1447.98,1649.6 1978.77,1649.6 ; 2126.47,1681.94 U1_B.64@2215.87,1681.94
  Bottom Layer w6.01: 1978.77,1649.6 2028.69,1649.6 2061.03,1681.94 2126.47,1681.94
FREQB8: J1B.4 U1_B.3 | length 616.4
  Bottom Layer w6: J1B.4@1627.24,153.15 1803.42,153.15 1928.08,277.81 ; 2126.47,192.96 U1_B.3@2156.82,192.96
  Bottom Layer w6.01: 1928.08,277.81 2020.64,277.81 2105.49,192.96 2126.47,192.96
FREQB9: J1B.16 U1_B.9 | length 596.4
  Bottom Layer w6: J1B.16@1627.24,294.88 1775.45,294.88 1878.37,397.81 ; 2126.47,339.42 U1_B.9@2156.82,339.42
  Bottom Layer w6.01: 1878.37,397.81 2045.32,397.81 2103.71,339.42 2126.47,339.42
FREQB10: J2B.78 U1_B.61 | length 1259.6
  Bottom Layer w6: J2B.78@941.26,1676.77 1335.96,1676.77 1423.13,1589.6 1978.77,1589.6 ; 2126.47,1608.71 U1_B.61@2156.82,1608.71
  Bottom Layer w6.01: 1978.77,1589.6 2053.91,1589.6 2073.02,1608.71 2126.47,1608.71
FREQB11: J1B.83 J1B.84 J2B.30 U1_B.37 | length 1261.4
  Bottom Layer w6: J2B.30@941.26,1109.84 1213.87,1109.84 1237.5,1086.22 J1B.83@1404.8,1086.22 1489.5,1086.22 1501.31,1098.03 J1B.84@1627.24,1098.03 1695.8,1098.03 1739.44,1054.39 ; 2126.47,1022.88 U1_B.37@2156.82,1022.88
  Bottom Layer w6.01: 1739.44,1054.39 1961.69,1054.39 1993.2,1022.88 2126.47,1022.88
FREQB12: J1B.12 U1_B.7 | length 603
  Bottom Layer w6: J1B.12@1627.24,247.64 1784.77,247.64 1894.94,357.81 ; 2126.47,290.6 U1_B.7@2156.82,290.6
  Bottom Layer w6.01: 1894.94,357.81 2034.22,357.81 2101.43,290.6 2126.47,290.6
FREQB13: J1B.36 U1_B.19 | length 563.1
  Bottom Layer w6: J1B.36@1627.24,531.1 1728.83,531.1 1795.53,597.81 ; 2126.47,583.51 U1_B.19@2156.82,583.51
  Bottom Layer w6.01: 1795.53,597.81 2095.7,597.81 2110,583.51 2126.47,583.51
FREQB14: J2B.42 U1_B.43 | length 1249.2
  Bottom Layer w6: J2B.42@941.26,1251.58 1252.04,1251.58 1274.94,1228.68 1461.77,1228.68 ; 1461.99,1228.9 1652.1,1228.9 ; 1652.32,1228.68 1823.35,1228.68 ; 2126.47,1169.34 U1_B.43@2156.82,1169.34
  Bottom Layer w6.01: 1823.35,1228.68 1962.79,1228.68 2022.13,1169.34 2126.47,1169.34
FREQB15: J2B.54 U1_B.49 | length 1247.7
  Bottom Layer w6: J2B.54@941.26,1393.31 1280.01,1393.31 1323.72,1349.6 1978.77,1349.6 ; 2126.47,1315.79 U1_B.49@2156.82,1315.79
  Bottom Layer w6.01: 1978.77,1349.6 2046.37,1349.6 2080.17,1315.79 2126.47,1315.79
FREQB16: J1B.40 U1_B.21 | length 551.9
  Bottom Layer w6: J1B.40@1627.24,578.35 1718.9,578.35 1744.25,603.7 ; 2126.47,632.33 U1_B.21@2156.82,632.33
  Bottom Layer w6.01: 1744.25,603.7 1772.88,632.33 2126.47,632.33
FREQB17: J2B.66 U1_B.55 | length 1245.7
  Bottom Layer w6: J2B.66@941.26,1535.04 1307.99,1535.04 1373.42,1469.6 1978.77,1469.6 ; 2126.47,1462.25 U1_B.55@2156.82,1462.25
  Bottom Layer w6.01: 1978.77,1469.6 2106.18,1469.6 2113.53,1462.25 2126.47,1462.25
FREQB18: J1B.48 U1_B.25 | length 553.2
  Bottom Layer w6: J1B.48@1627.24,672.84 1700.25,672.84 1711.11,683.7 1711.72,683.7 1749.33,721.32 ; 2126.47,729.97 U1_B.25@2156.82,729.97
  Bottom Layer w6.01: 1749.33,721.32 1757.99,729.97 2126.47,729.97
FREQB19: J1B.60 U1_B.31 | length 555.2
  Bottom Layer w6: J1B.60@1627.24,814.57 1672.88,814.57 1717.25,858.93 ; 2126.47,876.42 U1_B.31@2156.82,876.42
  Bottom Layer w6.01: 1717.25,858.93 1734.74,876.42 2126.47,876.42
FREQB20: J2B.90 U1_B.67 | length 1279.5
  Bottom Layer w6: J2B.90@941.26,1818.5 1363.93,1818.5 1472.84,1709.6 1978.77,1709.6 ; 2126.47,1755.16 U1_B.67@2156.82,1755.16
  Bottom Layer w6.01: 1978.77,1709.6 2008.37,1709.6 2053.94,1755.16 2126.47,1755.16
FREQB21: J2B.58 U1_B.51 | length 1247
  Bottom Layer w6: J2B.58@941.26,1440.55 1289.34,1440.55 1340.29,1389.6 1978.77,1389.6 ; 2126.47,1364.61 U1_B.51@2156.82,1364.61
  Bottom Layer w6.01: 1978.77,1389.6 2074.66,1389.6 2099.64,1364.61 2126.47,1364.61
FREQB22: J1B.6 U1_B.4 | length 672.1
  Bottom Layer w6: J1B.6@1627.24,176.77 1798.76,176.77 1919.79,297.81 ; 2126.47,217.37 U1_B.4@2215.87,217.37
  Bottom Layer w6.01: 1919.79,297.81 2023.23,297.81 2103.67,217.37 2126.47,217.37
FREQB23: J1B.54 U1_B.28 | length 614.4
  Bottom Layer w6: J1B.54@1627.24,743.7 1686.87,743.7 1747.75,804.58 ; 2126.47,803.2 U1_B.28@2215.87,803.2
  Bottom Layer w6.01: 1747.75,804.58 2125.08,804.58 2126.47,803.2
FREQB24: J1B.18 U1_B.10 | length 652.1
  Bottom Layer w6: J1B.18@1627.24,318.5 1770.79,318.5 1870.09,417.81 ; 2126.47,363.83 U1_B.10@2215.87,363.83
  Bottom Layer w6.01: 1870.09,417.81 2050.06,417.81 2104.04,363.83 2126.47,363.83
FREQB25: J1B.28 U1_B.15 | length 576.4
  Bottom Layer w6: J1B.28@1627.24,436.61 1747.48,436.61 1828.67,517.81 ; 2126.47,485.87 U1_B.15@2156.82,485.87
  Bottom Layer w6.01: 1828.67,517.81 2075.91,517.81 2107.85,485.87 2126.47,485.87
FREQB26: J1B.87 J1B.88 J2B.34 U1_B.39 | length 1260.7
  Bottom Layer w6: J2B.34@941.26,1157.09 1227.65,1157.09 1251.28,1133.47 J1B.87@1404.8,1133.47 1479.8,1133.47 1491.61,1145.28 J1B.88@1627.24,1145.28 1722.79,1145.28 1758.17,1109.9 ; 2126.47,1071.7 U1_B.39@2156.82,1071.7
  Bottom Layer w6.01: 1758.17,1109.9 1963.45,1109.9 2001.65,1071.7 2126.47,1071.7
FREQB27: J2B.82 U1_B.63 | length 1266.2
  Bottom Layer w6: J2B.82@941.26,1724.02 1345.28,1724.02 1439.7,1629.6 1978.77,1629.6 ; 2126.47,1657.53 U1_B.63@2156.82,1657.53
  Bottom Layer w6.01: 1978.77,1629.6 2037.83,1629.6 2065.75,1657.53 2126.47,1657.53
FREQB28: J1B.66 U1_B.34 | length 633
  Bottom Layer w6: J1B.66@1627.24,885.43 1658.89,885.43 1744.58,971.12 ; 2126.47,949.65 U1_B.34@2215.87,949.65
  Bottom Layer w6.01: 1744.58,971.12 1964.07,971.12 1985.54,949.65 2126.47,949.65
FREQB29: J2B.48 U1_B.46 | length 1307.7
  Bottom Layer w6: J2B.48@941.26,1322.44 1266.03,1322.44 1298.87,1289.6 1978.77,1289.6 ; 2126.47,1242.57 U1_B.46@2215.87,1242.57
  Bottom Layer w6.01: 1978.77,1289.6 2011.61,1289.6 2058.65,1242.57 2126.47,1242.57
FREQB30: J2B.70 U1_B.57 | length 1244.2
  Bottom Layer w6: J2B.70@941.26,1582.28 1317.31,1582.28 1389.99,1509.6 1978.77,1509.6 ; 2126.47,1511.07 U1_B.57@2156.82,1511.07
  Bottom Layer w6.01: 1978.77,1509.6 2125,1509.6
FREQB31: J1B.42 U1_B.22 | length 611.3
  Bottom Layer w6: J1B.42@1627.24,601.97 1714.23,601.97 1735.97,623.7 ; 1769,656.74 U1_B.22@2215.87,656.74
  Bottom Layer w6.01: 1735.97,623.7 1769,656.74
FREQB32: J2B.60 U1_B.52 | length 1305.7
  Bottom Layer w6: J2B.60@941.26,1464.17 1294,1464.17 1348.57,1409.6 1978.77,1409.6 ; 2126.47,1389.02 U1_B.52@2215.87,1389.02
  Bottom Layer w6.01: 1978.77,1409.6 2083.35,1409.6 2103.92,1389.02 2126.47,1389.02
FREQB33: R1_B.2 U1_B.1 | length 1546
  Bottom Layer w6: R1_B.2@733.76,167.88 869.71,167.88 950.95,86.64 1793.47,86.64 1929.99,223.15 ; 2126.47,144.14 U1_B.1@2156.82,144.14
  Bottom Layer w6.01: 1929.99,223.15 2026.89,223.15 2105.9,144.14 2126.47,144.14
FREQB34: R2_B.2 U1_B.68 | length 1026.1
  Bottom Layer w6: R2_B.2@1273.48,1881.71 1615.67,1881.71 1767.78,1729.6 ; 2126.47,1779.57 U1_B.68@2215.87,1779.57
  Bottom Layer w6.01: 1767.78,1729.6 2000.03,1729.6 2050,1779.57 2126.47,1779.57
FREQB35: J1B.22 U1_B.12 | length 645.5
  Bottom Layer w6: J1B.22@1627.24,365.75 1761.46,365.75 1853.52,457.81 ; 2126.47,412.64 U1_B.12@2215.87,412.64
  Bottom Layer w6.01: 1853.52,457.81 2056.85,457.81 2102.01,412.64 2126.47,412.64
FREQB36: J1B.85 J1B.86 J2B.32 U1_B.38 | length 1320.1
  Bottom Layer w6: J2B.32@941.26,1133.47 1219.55,1133.47 1243.17,1109.84 J1B.85@1404.8,1109.84 1484.84,1109.84 1496.65,1121.65 1709.48,1121.65 1748.99,1082.14 ; 2126.47,1047.29 U1_B.38@2215.87,1047.29
  Bottom Layer w6.01: 1748.99,1082.14 1965.44,1082.14 2000.29,1047.29 2126.47,1047.29
FREQB37: J1B.34 U1_B.18 | length 625.5
  Bottom Layer w6: J1B.34@1627.24,507.48 1733.49,507.48 1803.82,577.81 ; 2126.47,559.1 U1_B.18@2215.87,559.1
  Bottom Layer w6.01: 1803.82,577.81 2090.61,577.81 2109.31,559.1 2126.47,559.1
FREQB38: J2B.44 U1_B.44 | length 1308.5
  Bottom Layer w6: J2B.44@941.26,1275.2 1256.7,1275.2 1283.22,1248.68 1453.49,1248.68 1453.71,1248.9 1660.38,1248.9 1660.6,1248.68 1978.77,1248.68 ; 2126.47,1193.75 U1_B.44@2215.87,1193.75
  Bottom Layer w6.01: 1978.77,1248.68 2033.7,1193.75 2126.47,1193.75
FREQB39: J1B.14 U1_B.8 | length 658.8
  Bottom Layer w6: J1B.14@1627.24,271.26 1780.11,271.26 1886.66,377.81 ; 2126.47,315.01 U1_B.8@2215.87,315.01
  Bottom Layer w6.01: 1886.66,377.81 2040.58,377.81 2103.38,315.01 2126.47,315.01
FREQB40: J1B.62 U1_B.32 | length 614.6
  Bottom Layer w6: J1B.62@1627.24,838.19 1668.22,838.19 1703.1,873.07 ; 2126.47,900.83 U1_B.32@2215.87,900.83
  Bottom Layer w6.01: 1703.1,873.07 1730.86,900.83 2126.47,900.83
FREQB41: J2B.68 U1_B.56 | length 1304.4
  Bottom Layer w6: J2B.68@941.26,1558.66 1312.65,1558.66 1381.71,1489.6 1978.77,1489.6 ; 2126.47,1486.66 U1_B.56@2215.87,1486.66
  Bottom Layer w6.01: 1978.77,1489.6 2105.18,1489.6 2108.12,1486.66 2126.47,1486.66
FREQB42: J2B.80 U1_B.62 | length 1322
  Bottom Layer w6: J2B.80@941.26,1700.39 1340.62,1700.39 1431.41,1609.6 1978.77,1609.6 ; 2126.47,1633.12 U1_B.62@2215.87,1633.12
  Bottom Layer w6.01: 1978.77,1609.6 2042.8,1609.6 2066.32,1633.12 2126.47,1633.12
FREQB43: J1B.58 U1_B.30 | length 613.9
  Bottom Layer w6: J1B.58@1627.24,790.95 1677.54,790.95 1731.39,844.79 ; 2126.47,852.02 U1_B.30@2215.87,852.02
  Bottom Layer w6.01: 1731.39,844.79 1738.61,852.02 2126.47,852.02